# EAGLE board dmgK v36 (EAGLE 9.7.0)
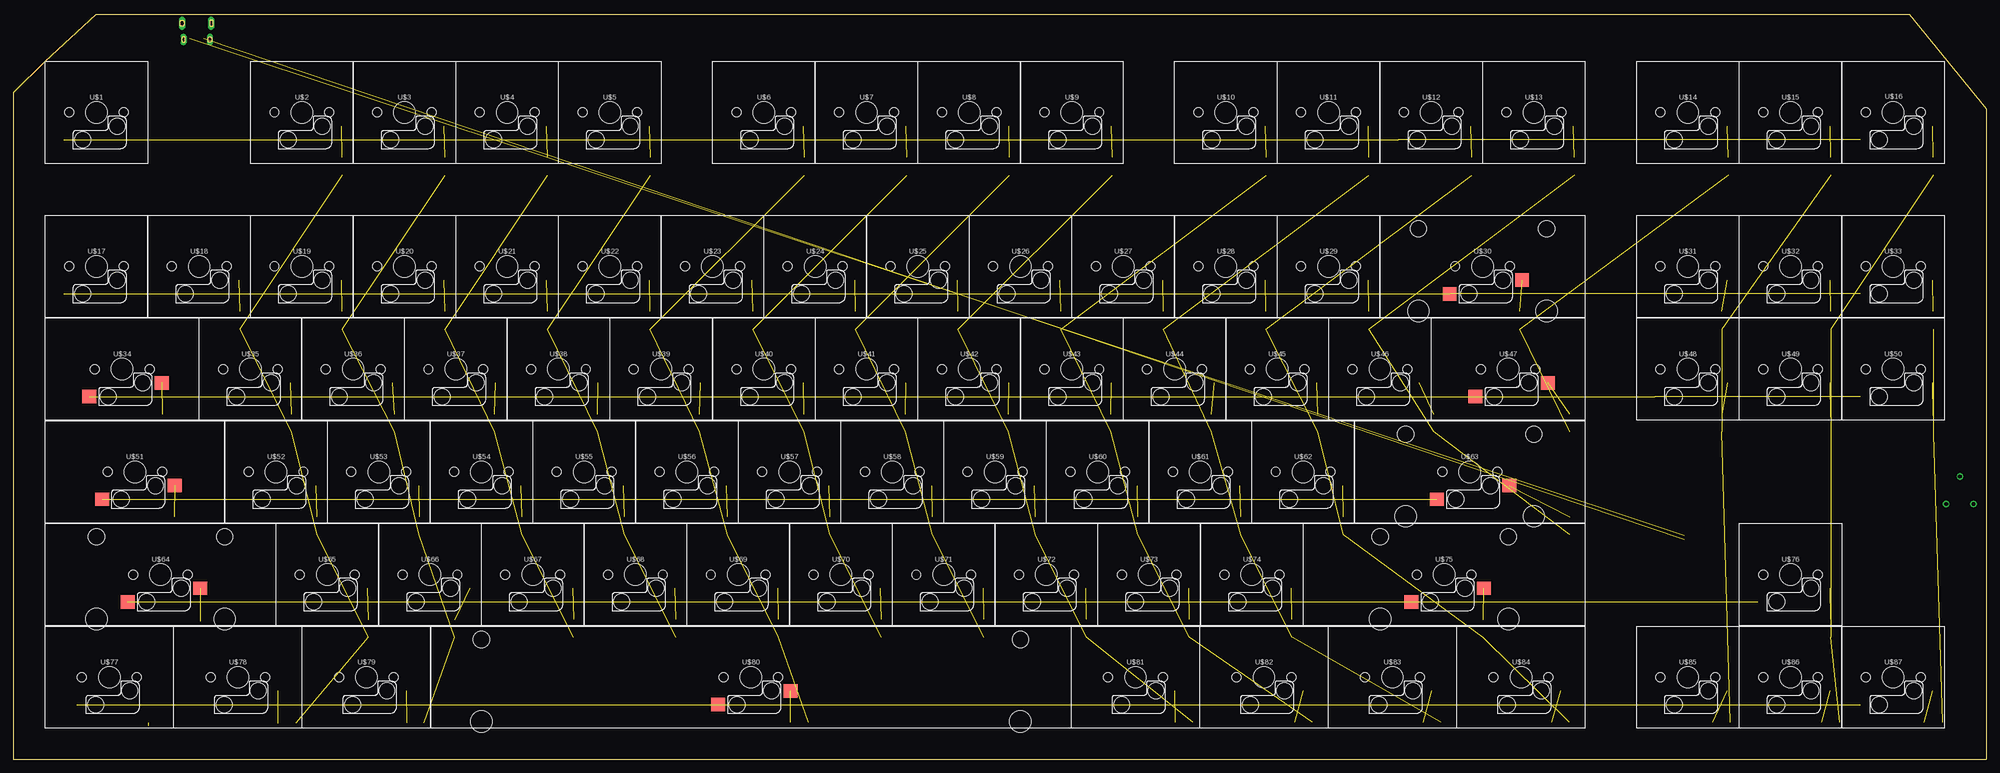
[diagram p0: board, top side]
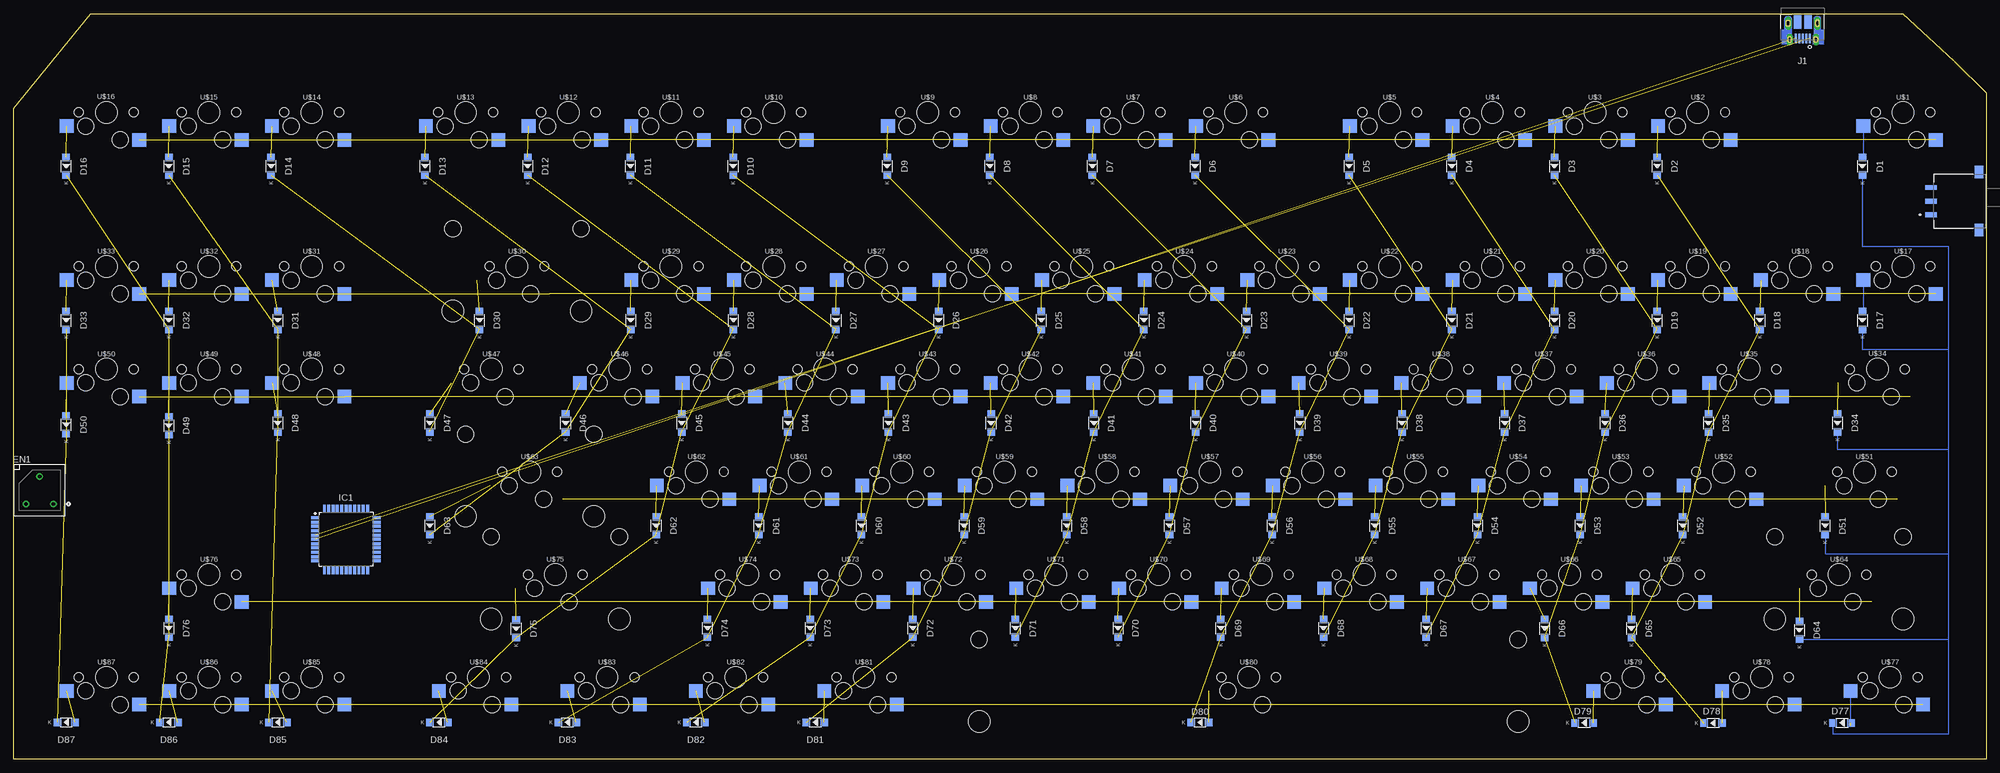
[diagram p1: board, bottom side, seen from below]

Size 366 x 138.22 mm. Coordinates in mm from the lower left corner, seen from the top.
Outline: 15.4,0 351.73,0
Outline: 15.4,0 0,0 0,123.64 5.88,129.53 15.4,138.22 351.73,138.22 366,120.69 366,0 15.4,0
Copper layers (1*16): Top / Bottom
Stack-up Default Layer Stack: Top User Defined 0.035mm / Dielectric-1 User Defined 1.5mm / Bottom User Defined 0.035mm
Design rules "default": minimum track width 6mil, minimum drill 0.35mm, track to track 6mil, track to pad 6mil, pad to pad 6mil, via to via 6mil, smd to smd 6mil, copper to edge 40mil, drill to drill 6mil, minimum pad ring 10mil, minimum via ring 8mil, stop-mask expansion 4mil, vias tented up to drill 0mil, thermal gap 10mil

## Footprints (pad centres in the part's own frame; a part is rotated, then mirrored left to right if it is on the bottom)
SOD-123 = smd 1.397 x 1.397: A -1.651,0; C 1.651,0
3315Y-001-006L = drill 0.71: A 2.54,-2.54; B -2.54,-2.54; C 0,2.54
QFP80P1200X1200X120-44 = smd 1.5 x 0.55: 1 -5.7,4; 2 -5.7,3.2; 3 -5.7,2.4; 4 -5.7,1.6; 5 -5.7,0.8; 6 -5.7,0; 7 -5.7,-0.8; 8 -5.7,-1.6; 9 -5.7,-2.4; 10 -5.7,-3.2; 11 -5.7,-4; 23 5.7,-4; 24 5.7,-3.2; 25 5.7,-2.4; 26 5.7,-1.6; 27 5.7,-0.8; 28 5.7,0; 29 5.7,0.8; 30 5.7,1.6; 31 5.7,2.4; 32 5.7,3.2; 33 5.7,4 | smd 0.55 x 1.5: 12 -4,-5.7; 13 -3.2,-5.7; 14 -2.4,-5.7; 15 -1.6,-5.7; 16 -0.8,-5.7; 17 0,-5.7; 18 0.8,-5.7; 19 1.6,-5.7; 20 2.4,-5.7; 21 3.2,-5.7; 22 4,-5.7; 34 4,5.7; 35 3.2,5.7; 36 2.4,5.7; 37 1.6,5.7; 38 0.8,5.7; 39 0,5.7; 40 -0.8,5.7; 41 -1.6,5.7; 42 -2.4,5.7; 43 -3.2,5.7; 44 -4,5.7
10103594 = smd 0.4 x 1.75: 1 -1.3,2.825; 2 -0.65,2.825; 3 0,2.825; 4 0.65,2.825; 5 1.3,2.825 | smd 1.425 x 2.5: 6 -0.963,-0.25; 7 0.963,-0.25 | drill 0.65 pad 0.73 long: SH1 -2.425,3.03; SH2 2.425,3.03 | drill 0.7 long: SH3 -2.725,0; SH4 2.725,0
ES03MSABE = smd 0.89 x 2.08: 1 2.54,0; 2 0,0; 3 -2.54,0 | smd 2.325 x 1.52: S1 -5.378,8.92; S2 5.378,8.92
MXHSPCB-1U = smd 2.55 x 2.5 bottom: MX1 7.36,-2.54; MX2 -6.09,-5.08 | hole 4: 0,0 | hole 1.7: -5.08,0; 5.08,0 | hole 3: 3.81,-2.54; -2.54,-5.08
MXHSPCB-2U = smd 2.55 x 2.5: MX1 7.36,-2.54; MX2 -6.09,-5.08 | hole 4: 0,0; -11.9,-8.24; 11.9,-8.24 | hole 1.7: -5.08,0; 5.08,0 | hole 3.05: -11.9,7; 11.9,7 | hole 3: 3.81,-2.54; -2.54,-5.08
MXHSPCB-1.5U = smd 2.55 x 2.5: MX1 7.36,-2.54; MX2 -6.09,-5.08 | hole 4: 0,0 | hole 1.7: -5.08,0; 5.08,0 | hole 3: 3.81,-2.54; -2.54,-5.08
MXHSPCB-1.75U = smd 2.55 x 2.5: MX1 7.36,-2.54; MX2 -6.09,-5.08 | hole 4: 0,0 | hole 1.7: -5.08,0; 5.08,0 | hole 3: 3.81,-2.54; -2.54,-5.08
MXHSPCB-2.25U = smd 2.55 x 2.5: MX1 7.36,-2.54; MX2 -6.09,-5.08 | hole 4: 0,0; -11.9,-8.24; 11.9,-8.24 | hole 1.7: -5.08,0; 5.08,0 | hole 3.05: -11.9,7; 11.9,7 | hole 3: 3.81,-2.54; -2.54,-5.08
MXHSPCB-2.75U = smd 2.55 x 2.5: MX1 7.36,-2.54; MX2 -6.09,-5.08 | hole 4: 0,0; -11.9,-8.24; 11.9,-8.24 | hole 1.7: -5.08,0; 5.08,0 | hole 3.05: -11.9,7; 11.9,7 | hole 3: 3.81,-2.54; -2.54,-5.08
MXHSPCB-1.25U = smd 2.55 x 2.5 bottom: MX1 7.36,-2.54; MX2 -6.09,-5.08 | hole 4: 0,0 | hole 1.7: -5.08,0; 5.08,0 | hole 3: 3.81,-2.54; -2.54,-5.08
MXHSPCB-6.25U = smd 2.55 x 2.5: MX1 7.36,-2.54; MX2 -6.09,-5.08 | hole 4: 0,0; -50,-8.24; 50,-8.24 | hole 1.7: -5.08,0; 5.08,0 | hole 3: 3.81,-2.54; -2.54,-5.08 | hole 3.05: -50,7; 50,7

## Placement (x,y rotation side)
D1  DIODE  [SOD-123]  22.93,110 270 bottom
D2  DIODE  [SOD-123]  61.03,110 270 bottom
D3  DIODE  [SOD-123]  80.08,110 270 bottom
D4  DIODE  [SOD-123]  99.13,110 270 bottom
D5  DIODE  [SOD-123]  118.18,110 270 bottom
D6  DIODE  [SOD-123]  146.75,110 270 bottom
D7  DIODE  [SOD-123]  165.8,110 270 bottom
D8  DIODE  [SOD-123]  184.85,110 270 bottom
D9  DIODE  [SOD-123]  203.9,110 270 bottom
D10  DIODE  [SOD-123]  232.48,110 270 bottom
D11  DIODE  [SOD-123]  251.53,110 270 bottom
D12  DIODE  [SOD-123]  270.58,110 270 bottom
D13  DIODE  [SOD-123]  289.63,110 270 bottom
D14  DIODE  [SOD-123]  318.2,110 270 bottom
D15  DIODE  [SOD-123]  337.17,110 270 bottom
D16  DIODE  [SOD-123]  356.22,110 270 bottom
D17  DIODE  [SOD-123]  22.93,81.42 270 bottom
D18  DIODE  [SOD-123]  41.97,81.42 270 bottom
D19  DIODE  [SOD-123]  61.02,81.42 270 bottom
D20  DIODE  [SOD-123]  80.06,81.42 270 bottom
D21  DIODE  [SOD-123]  99.11,81.42 270 bottom
D22  DIODE  [SOD-123]  118.16,81.42 270 bottom
D23  DIODE  [SOD-123]  137.2,81.42 270 bottom
D24  DIODE  [SOD-123]  156.25,81.42 270 bottom
D25  DIODE  [SOD-123]  175.29,81.42 270 bottom
D26  DIODE  [SOD-123]  194.34,81.42 270 bottom
D27  DIODE  [SOD-123]  213.38,81.42 270 bottom
D28  DIODE  [SOD-123]  232.43,81.42 270 bottom
D29  DIODE  [SOD-123]  251.47,81.42 270 bottom
D30  DIODE  [SOD-123]  279.53,81.42 270 bottom
D31  DIODE  [SOD-123]  316.95,81.42 270 bottom
D32  DIODE  [SOD-123]  337.17,81.42 270 bottom
D33  DIODE  [SOD-123]  356.22,81.42 270 bottom
D34  DIODE  [SOD-123]  27.56,62.38 270 bottom
D35  DIODE  [SOD-123]  51.5,62.38 270 bottom
D36  DIODE  [SOD-123]  70.69,62.38 270 bottom
D37  DIODE  [SOD-123]  89.3,62.38 270 bottom
D38  DIODE  [SOD-123]  108.37,62.38 270 bottom
D39  DIODE  [SOD-123]  127.31,62.38 270 bottom
D40  DIODE  [SOD-123]  146.65,62.38 270 bottom
D41  DIODE  [SOD-123]  165.54,62.38 270 bottom
D42  DIODE  [SOD-123]  184.62,62.38 270 bottom
D43  DIODE  [SOD-123]  203.64,62.38 270 bottom
D44  DIODE  [SOD-123]  222.3,62.38 270 bottom
D45  DIODE  [SOD-123]  242,62.38 270 bottom
D46  DIODE  [SOD-123]  263.56,62.38 270 bottom
D47  DIODE  [SOD-123]  288.75,62.38 270 bottom
D48  DIODE  [SOD-123]  316.95,62.38 270 bottom
D49  DIODE  [SOD-123]  337.17,61.89 270 bottom
D50  DIODE  [SOD-123]  356.22,62.06 270 bottom
D51  DIODE  [SOD-123]  29.86,43.33 270 bottom
D52  DIODE  [SOD-123]  56.26,43.33 270 bottom
D53  DIODE  [SOD-123]  75.31,43.33 270 bottom
D54  DIODE  [SOD-123]  94.36,43.33 270 bottom
D55  DIODE  [SOD-123]  113.41,43.33 270 bottom
D56  DIODE  [SOD-123]  132.46,43.33 270 bottom
D57  DIODE  [SOD-123]  151.51,43.33 270 bottom
D58  DIODE  [SOD-123]  170.56,43.33 270 bottom
D59  DIODE  [SOD-123]  189.61,43.33 270 bottom
D60  DIODE  [SOD-123]  208.66,43.33 270 bottom
D61  DIODE  [SOD-123]  227.71,43.33 270 bottom
D62  DIODE  [SOD-123]  246.76,43.33 270 bottom
D63  DIODE  [SOD-123]  288.75,43.33 270 bottom
D64  DIODE  [SOD-123]  34.62,23.93 270 bottom
D65  DIODE  [SOD-123]  65.79,24.28 270 bottom
D66  DIODE  [SOD-123]  81.89,24.28 270 bottom
D67  DIODE  [SOD-123]  103.89,24.31 270 bottom
D68  DIODE  [SOD-123]  122.94,24.31 270 bottom
D69  DIODE  [SOD-123]  141.99,24.31 270 bottom
D70  DIODE  [SOD-123]  161.04,24.31 270 bottom
D71  DIODE  [SOD-123]  180.09,24.31 270 bottom
D72  DIODE  [SOD-123]  199.14,24.31 270 bottom
D73  DIODE  [SOD-123]  218.19,24.31 270 bottom
D74  DIODE  [SOD-123]  237.24,24.31 270 bottom
D75  DIODE  [SOD-123]  272.73,24.23 270 bottom
D76  DIODE  [SOD-123]  337.17,24.31 270 bottom
D77  DIODE  [SOD-123]  26.73,6.76 180 bottom
D78  DIODE  [SOD-123]  50.67,6.73 180 bottom
D79  DIODE  [SOD-123]  74.57,6.78 180 bottom
D80  DIODE  [SOD-123]  145.85,6.84 180 bottom
D81  DIODE  [SOD-123]  217.22,6.86 180 bottom
D82  DIODE  [SOD-123]  239.39,6.86 180 bottom
D83  DIODE  [SOD-123]  263.22,6.86 180 bottom
D84  DIODE  [SOD-123]  287.05,6.86 180 bottom
D85  DIODE  [SOD-123]  316.95,6.86 180 bottom
D86  DIODE  [SOD-123]  337.17,6.86 180 bottom
D87  DIODE  [SOD-123]  356.22,6.86 180 bottom
EN1  3315Y-001-006L  [3315Y-001-006L]  361.14,49.92 0 bottom
IC1  ATMEGA16  [QFP80P1200X1200X120-44]  304.3,40.81 0 bottom
J1  10103594  [10103594]  34.01,136.54 180 bottom
S1  ES03MSABE  [ES03MSABE]  10.22,103.53 270 bottom
U$1  KS-MXHSPCB-1.0U  [MXHSPCB-1U]  15.4,120 0 top
U$2  KS-MXHSPCB-1.0U  [MXHSPCB-1U]  53.5,120 0 top
U$3  KS-MXHSPCB-1.0U  [MXHSPCB-1U]  72.55,120 0 top
U$4  KS-MXHSPCB-1.0U  [MXHSPCB-1U]  91.6,120 0 top
U$5  KS-MXHSPCB-1.0U  [MXHSPCB-1U]  110.65,120 0 top
U$6  KS-MXHSPCB-1.0U  [MXHSPCB-1U]  139.22,120 0 top
U$7  KS-MXHSPCB-1.0U  [MXHSPCB-1U]  158.28,120 0 top
U$8  KS-MXHSPCB-1.0U  [MXHSPCB-1U]  177.33,120 0 top
U$9  KS-MXHSPCB-1.0U  [MXHSPCB-1U]  196.38,120 0 top
U$10  KS-MXHSPCB-1.0U  [MXHSPCB-1U]  224.95,120 0 top
U$11  KS-MXHSPCB-1.0U  [MXHSPCB-1U]  244,120 0 top
U$12  KS-MXHSPCB-1.0U  [MXHSPCB-1U]  263.05,120 0 top
U$13  KS-MXHSPCB-1.0U  [MXHSPCB-1U]  282.1,120 0 top
U$14  KS-MXHSPCB-1.0U  [MXHSPCB-1U]  310.67,120 0 top
U$15  KS-MXHSPCB-1.0U  [MXHSPCB-1U]  329.72,120 0 top
U$16  KS-MXHSPCB-1.0U  [MXHSPCB-1U]  348.77,120 0 top
U$17  KS-MXHSPCB-1.0U  [MXHSPCB-1U]  15.4,91.42 0 top
U$18  KS-MXHSPCB-1.0U  [MXHSPCB-1U]  34.45,91.42 0 top
U$19  KS-MXHSPCB-1.0U  [MXHSPCB-1U]  53.5,91.42 0 top
U$20  KS-MXHSPCB-1.0U  [MXHSPCB-1U]  72.55,91.42 0 top
U$21  KS-MXHSPCB-1.0U  [MXHSPCB-1U]  91.6,91.42 0 top
U$22  KS-MXHSPCB-1.0U  [MXHSPCB-1U]  110.65,91.42 0 top
U$23  KS-MXHSPCB-1.0U  [MXHSPCB-1U]  129.7,91.42 0 top
U$24  KS-MXHSPCB-1.0U  [MXHSPCB-1U]  148.75,91.42 0 top
U$25  KS-MXHSPCB-1.0U  [MXHSPCB-1U]  167.8,91.42 0 top
U$26  KS-MXHSPCB-1.0U  [MXHSPCB-1U]  186.85,91.42 0 top
U$27  KS-MXHSPCB-1.0U  [MXHSPCB-1U]  205.9,91.42 0 top
U$28  KS-MXHSPCB-1.0U  [MXHSPCB-1U]  224.95,91.42 0 top
U$29  KS-MXHSPCB-1.0U  [MXHSPCB-1U]  244,91.42 0 top
U$30  KS-MXHSPCB-2.0U  [MXHSPCB-2U]  272.57,91.42 0 top
U$31  KS-MXHSPCB-1.0U  [MXHSPCB-1U]  310.67,91.42 0 top
U$32  KS-MXHSPCB-1.0U  [MXHSPCB-1U]  329.72,91.42 0 top
U$33  KS-MXHSPCB-1.0U  [MXHSPCB-1U]  348.77,91.42 0 top
U$34  KS-MXHSPCB-1.5U  [MXHSPCB-1.5U]  20.16,72.38 0 top
U$35  KS-MXHSPCB-1.0U  [MXHSPCB-1U]  43.96,72.38 0 top
U$36  KS-MXHSPCB-1.0U  [MXHSPCB-1U]  63.02,72.38 0 top
U$37  KS-MXHSPCB-1.0U  [MXHSPCB-1U]  82.07,72.38 0 top
U$38  KS-MXHSPCB-1.0U  [MXHSPCB-1U]  101.12,72.38 0 top
U$39  KS-MXHSPCB-1.0U  [MXHSPCB-1U]  120.17,72.38 0 top
U$40  KS-MXHSPCB-1.0U  [MXHSPCB-1U]  139.22,72.38 0 top
U$41  KS-MXHSPCB-1.0U  [MXHSPCB-1U]  158.28,72.38 0 top
U$42  KS-MXHSPCB-1.0U  [MXHSPCB-1U]  177.33,72.38 0 top
U$43  KS-MXHSPCB-1.0U  [MXHSPCB-1U]  196.38,72.38 0 top
U$44  KS-MXHSPCB-1.0U  [MXHSPCB-1U]  215.43,72.38 0 top
U$45  KS-MXHSPCB-1.0U  [MXHSPCB-1U]  234.48,72.38 0 top
U$46  KS-MXHSPCB-1.0U  [MXHSPCB-1U]  253.54,72.38 0 top
U$47  KS-MXHSPCB-1.5U  [MXHSPCB-1.5U]  277.34,72.38 0 top
U$48  KS-MXHSPCB-1.0U  [MXHSPCB-1U]  310.67,72.38 0 top
U$49  KS-MXHSPCB-1.0U  [MXHSPCB-1U]  329.72,72.38 0 top
U$50  KS-MXHSPCB-1.0U  [MXHSPCB-1U]  348.77,72.38 0 top
U$51  KS-MXHSPCB-1.75U  [MXHSPCB-1.75U]  22.54,53.33 0 top
U$52  KS-MXHSPCB-1.0U  [MXHSPCB-1U]  48.72,53.33 0 top
U$53  KS-MXHSPCB-1.0U  [MXHSPCB-1U]  67.78,53.33 0 top
U$54  KS-MXHSPCB-1.0U  [MXHSPCB-1U]  86.83,53.33 0 top
U$55  KS-MXHSPCB-1.0U  [MXHSPCB-1U]  105.89,53.33 0 top
U$56  KS-MXHSPCB-1.0U  [MXHSPCB-1U]  124.94,53.33 0 top
U$57  KS-MXHSPCB-1.0U  [MXHSPCB-1U]  144,53.33 0 top
U$58  KS-MXHSPCB-1.0U  [MXHSPCB-1U]  163.06,53.33 0 top
U$59  KS-MXHSPCB-1.0U  [MXHSPCB-1U]  182.11,53.33 0 top
U$60  KS-MXHSPCB-1.0U  [MXHSPCB-1U]  201.17,53.33 0 top
U$61  KS-MXHSPCB-1.0U  [MXHSPCB-1U]  220.23,53.33 0 top
U$62  KS-MXHSPCB-1.0U  [MXHSPCB-1U]  239.28,53.33 0 top
U$63  KS-MXHSPCB-2.25U  [MXHSPCB-2.25U]  270.21,53.33 0 top
U$64  KS-MXHSPCB-2.25U  [MXHSPCB-2.25U]  27.29,34.28 0 top
U$65  KS-MXHSPCB-1.0U  [MXHSPCB-1U]  58.22,34.28 0 top
U$66  KS-MXHSPCB-1.0U  [MXHSPCB-1U]  77.29,34.28 0 top
U$67  KS-MXHSPCB-1.0U  [MXHSPCB-1U]  96.35,34.28 0 top
U$68  KS-MXHSPCB-1.0U  [MXHSPCB-1U]  115.41,34.28 0 top
U$69  KS-MXHSPCB-1.0U  [MXHSPCB-1U]  134.47,34.28 0 top
U$70  KS-MXHSPCB-1.0U  [MXHSPCB-1U]  153.53,34.28 0 top
U$71  KS-MXHSPCB-1.0U  [MXHSPCB-1U]  172.59,34.28 0 top
U$72  KS-MXHSPCB-1.0U  [MXHSPCB-1U]  191.65,34.28 0 top
U$73  KS-MXHSPCB-1.0U  [MXHSPCB-1U]  210.71,34.28 0 top
U$74  KS-MXHSPCB-1.0U  [MXHSPCB-1U]  229.78,34.28 0 top
U$75  KSMXHSPCB-2.75U  [MXHSPCB-2.75U]  265.46,34.28 0 top
U$76  KS-MXHSPCB-1.0U  [MXHSPCB-1U]  329.72,34.28 0 top
U$77  KS-MXHSPCB-1.25U  [MXHSPCB-1.25U]  17.79,15.22 0 top
U$78  KS-MXHSPCB-1.25U  [MXHSPCB-1.25U]  41.63,15.22 0 top
U$79  KS-MXHSPCB-1.25U  [MXHSPCB-1.25U]  65.48,15.22 0 top
U$80  KS-MXHSPCB-6.25U  [MXHSPCB-6.25U]  136.83,15.22 0 top
U$81  KS-MXHSPCB-1.25U  [MXHSPCB-1.25U]  208.17,15.22 0 top
U$82  KS-MXHSPCB-1.25U  [MXHSPCB-1.25U]  232.02,15.22 0 top
U$83  KS-MXHSPCB-1.25U  [MXHSPCB-1.25U]  255.87,15.22 0 top
U$84  KS-MXHSPCB-1.25U  [MXHSPCB-1.25U]  279.71,15.22 0 top
U$85  KS-MXHSPCB-1.0U  [MXHSPCB-1U]  310.67,15.22 0 top
U$86  KS-MXHSPCB-1.0U  [MXHSPCB-1U]  329.72,15.22 0 top
U$87  KS-MXHSPCB-1.0U  [MXHSPCB-1U]  348.77,15.22 0 top

## Library data of the parts
D1-D87 = Controller
EN1 = Encoders; CREATED_BY: PCBLayout.com; DIGIKEY_PARTNO: 3315Y-001-006L-ND; MANUFACTURER: Bourns Inc.; MPN: 3315Y-001-006L
IC1 = TL; CATEGORY: IC_Embedded; DESCRIPTION: IC MCU 8BIT 32KB FLASH 44TQFP; MANUFACTURER: Microchip Technology; MPN: ATMEGA32-16AQR; OPERATING_TEMP: -40°C to 105°C; PART_STATUS: Active; SERIES: AVR® ATmega; SPEED: 16MHz; SUB-CATEGORY: Microcontroller
J1 = Connector_USB; CATEGORY: Connectors; CONTACTS: 5; CURRENT-RATING: 1.8A; DESCRIPTION: CONN RCPT USB2.0 MICRO B SMD R/A; GENDER: Receptacle; MANUFACTURER: Amphenol ICC (FCI); MOUNT_TYPE: R/A; MPN: 10103594-0001LF; OPERATING_TEMPERATURE: -30°C ~ 80°C; PART_STATUS: ACTIVE; ROHS_COMPLIANT: COMPLIANT; SUB_CATEGORY: USB; TYPE: USB-micro B; VOLTAGE-RATING: 100VAC
S1 = Switch; CREATED_BY: PCBLayout.com; DIGIKEY_PARTNO: CKN2086TR-ND; MANUFACTURER: C&K; MPN: ES03MSABE
U$1-U$87 = TL

## Nets
AVCC: IC1.27
GND: IC1.6 J1.5
GND1: IC1.18
GND2: IC1.39
GND3: IC1.28
N$1: D1.A U$1.MX1
N$2: D2.A U$2.MX1
N$3: D3.A U$3.MX1
N$4: D4.A U$4.MX1
N$5: D5.A U$5.MX1
N$6: D6.A U$6.MX1
N$7: D7.A U$7.MX1
N$8: D8.A U$8.MX1
N$9: D9.A U$9.MX1
N$10: D10.A U$10.MX1
N$11: D11.A U$11.MX1
N$12: D12.A U$12.MX1
N$13: D13.A U$13.MX1
N$14: D14.A U$14.MX1
N$15: D15.A U$15.MX1
N$16: D16.A U$16.MX1
N$17: D17.A U$17.MX1
N$18: D18.A U$18.MX1
N$19: D19.A U$19.MX1
N$20: D20.A U$20.MX1
N$21: D21.A U$21.MX1
N$22: D22.A U$22.MX1
N$23: D23.A U$23.MX1
N$24: D24.A U$24.MX1
N$25: D25.A U$25.MX1
N$26: D26.A U$26.MX1
N$27: D27.A U$27.MX1
N$28: D28.A U$28.MX1
N$29: D29.A U$29.MX1
N$30: D30.A U$30.MX1
N$31: D31.A U$31.MX1
N$32: D32.A U$32.MX1
N$33: D33.A U$33.MX1
N$34: D34.A U$34.MX1
N$35: D35.A U$35.MX1
N$36: D36.A U$36.MX1
N$37: D37.A U$37.MX1
N$38: D38.A U$38.MX1
N$39: D39.A U$39.MX1
N$40: D40.A U$40.MX1
N$41: D41.A U$41.MX1
N$42: D42.A U$42.MX1
N$43: D43.A U$43.MX1
N$44: D44.A U$44.MX1
N$45: D45.A U$45.MX1
N$46: D46.A U$46.MX1
N$47: D47.A U$47.MX1
N$48: D48.A U$48.MX1
N$49: D49.A U$49.MX1
N$50: D50.A U$50.MX1
N$51: D51.A U$51.MX1
N$52: D52.A U$52.MX1
N$53: D53.A U$53.MX1
N$54: D54.A U$54.MX1
N$55: D55.A U$55.MX1
N$56: D56.A U$56.MX1
N$57: D57.A U$57.MX1
N$58: D58.A U$58.MX1
N$59: D59.A U$59.MX1
N$60: D60.A U$60.MX1
N$61: D61.A U$61.MX1
N$62: D62.A U$62.MX1
N$63: D63.A U$63.MX1
N$64: D64.A U$64.MX1
N$65: D65.A U$65.MX1
N$66: D66.A U$66.MX1
N$67: D67.A U$67.MX1
N$68: D68.A U$68.MX1
N$69: D69.A U$69.MX1
N$70: D70.A U$70.MX1
N$71: D71.A U$71.MX1
N$72: D72.A U$72.MX1
N$73: D73.A U$73.MX1
N$74: D74.A U$74.MX1
N$75: D75.A U$75.MX1
N$76: D76.A U$76.MX1
N$77: D77.A U$77.MX1
N$78: D78.A U$78.MX1
N$79: D79.A U$79.MX1
N$80: D80.A U$80.MX1
N$81: D81.A U$81.MX1
N$82: D82.A U$82.MX1
N$83: D83.A U$83.MX1
N$84: D84.A U$84.MX1
N$85: D85.A U$85.MX1
N$86: D86.A U$86.MX1
N$87: D87.A U$87.MX1
N$88: U$1.MX2 U$2.MX2 U$3.MX2 U$4.MX2 U$5.MX2 U$6.MX2 U$7.MX2 U$8.MX2 U$9.MX2 U$10.MX2 U$11.MX2 U$12.MX2 U$13.MX2 U$14.MX2 U$15.MX2 U$16.MX2
N$89: U$17.MX2 U$18.MX2 U$19.MX2 U$20.MX2 U$21.MX2 U$22.MX2 U$23.MX2 U$24.MX2 U$25.MX2 U$26.MX2 U$27.MX2 U$28.MX2 U$29.MX2 U$30.MX2 U$31.MX2 U$32.MX2 U$33.MX2
N$90: U$34.MX2 U$35.MX2 U$36.MX2 U$37.MX2 U$38.MX2 U$39.MX2 U$40.MX2 U$41.MX2 U$42.MX2 U$43.MX2 U$44.MX2 U$45.MX2 U$46.MX2 U$47.MX2 U$48.MX2 U$49.MX2 U$50.MX2
N$91: U$51.MX2 U$52.MX2 U$53.MX2 U$54.MX2 U$55.MX2 U$56.MX2 U$57.MX2 U$58.MX2 U$59.MX2 U$60.MX2 U$61.MX2 U$62.MX2 U$63.MX2
N$92: U$64.MX2 U$65.MX2 U$66.MX2 U$67.MX2 U$68.MX2 U$69.MX2 U$70.MX2 U$71.MX2 U$72.MX2 U$73.MX2 U$74.MX2 U$75.MX2 U$76.MX2
N$93: U$77.MX2 U$78.MX2 U$79.MX2 U$80.MX2 U$81.MX2 U$82.MX2 U$83.MX2 U$84.MX2 U$85.MX2 U$86.MX2 U$87.MX2
N$94: D33.C D50.C D87.C
N$95: D16.C D32.C D49.C D76.C D86.C
N$96: D15.C D31.C D48.C D85.C
N$97: D14.C D30.C D47.C
N$98: D13.C D29.C D46.C D63.C
N$99: D12.C D28.C D45.C D62.C D75.C D84.C
N$100: D11.C D27.C D44.C D61.C D74.C D83.C
N$101: D10.C D26.C D43.C D60.C D73.C D82.C
N$102: D9.C D25.C D42.C D59.C D72.C D81.C
N$103: D8.C D24.C D41.C D58.C D71.C
N$104: D7.C D23.C D40.C D57.C D70.C
N$105: D6.C D22.C D39.C D56.C D69.C D80.C
N$106: D5.C D21.C D38.C D55.C D68.C
N$107: D4.C D20.C D37.C D54.C D67.C
N$108: D3.C D19.C D36.C D53.C D66.C D79.C
N$109: D2.C D18.C D35.C D52.C D65.C D78.C
N$110: D1.C D17.C D34.C D51.C D64.C D77.C
VCC: IC1.5 J1.1
VCC1: IC1.17
VCC2: IC1.38

## Tracks (layer width: path | path; a pad name or v marks a point on that pad's centre or on a via)
GND  (1 unrouted)
N$1
  Bottom 0.152: D1.A 22.76,111.82 U$1.MX1
N$2  (1 unrouted)
N$3  (1 unrouted)
N$4  (1 unrouted)
N$5  (1 unrouted)
N$6  (1 unrouted)
N$7  (1 unrouted)
N$8  (1 unrouted)
N$9  (1 unrouted)
N$10  (1 unrouted)
N$11  (1 unrouted)
N$12  (1 unrouted)
N$13  (1 unrouted)
N$14  (1 unrouted)
N$15  (1 unrouted)
N$16  (1 unrouted)
N$17
  Bottom 0.152: U$17.MX1 22.76,83.08 D17.A
N$18  (1 unrouted)
N$19  (1 unrouted)
N$20  (1 unrouted)
N$21  (1 unrouted)
N$22  (1 unrouted)
N$23  (1 unrouted)
N$24  (1 unrouted)
N$25  (1 unrouted)
N$26  (1 unrouted)
N$27  (1 unrouted)
N$28  (1 unrouted)
N$29  (1 unrouted)
N$30  (1 unrouted)
N$31  (1 unrouted)
N$32  (1 unrouted)
N$33  (1 unrouted)
N$34  (1 unrouted)
N$35  (1 unrouted)
N$36  (1 unrouted)
N$37  (1 unrouted)
N$38  (1 unrouted)
N$39  (1 unrouted)
N$40  (1 unrouted)
N$41  (1 unrouted)
N$42  (1 unrouted)
N$43  (1 unrouted)
N$44  (1 unrouted)
N$45  (1 unrouted)
N$46  (1 unrouted)
N$47  (1 unrouted)
N$48  (1 unrouted)
N$49  (1 unrouted)
N$50  (1 unrouted)
N$51  (1 unrouted)
N$52  (1 unrouted)
N$53  (1 unrouted)
N$54  (1 unrouted)
N$55  (1 unrouted)
N$56  (1 unrouted)
N$57  (1 unrouted)
N$58  (1 unrouted)
N$59  (1 unrouted)
N$60  (1 unrouted)
N$61  (1 unrouted)
N$62  (1 unrouted)
N$63  (1 unrouted)
N$64  (1 unrouted)
N$65  (1 unrouted)
N$66  (1 unrouted)
N$67  (1 unrouted)
N$68  (1 unrouted)
N$69  (1 unrouted)
N$70  (1 unrouted)
N$71  (1 unrouted)
N$72  (1 unrouted)
N$73  (1 unrouted)
N$74  (1 unrouted)
N$75  (1 unrouted)
N$76  (1 unrouted)
N$77  (1 unrouted)
  Bottom 0.152: U$77.MX1 25.15,6.2 25.13,6.2
N$78  (1 unrouted)
N$79  (1 unrouted)
N$80  (1 unrouted)
N$81  (1 unrouted)
N$82  (1 unrouted)
N$83  (1 unrouted)
N$84  (1 unrouted)
N$85  (1 unrouted)
N$86  (1 unrouted)
N$87  (1 unrouted)
N$88  (15 unrouted)
N$89  (16 unrouted)
N$90  (16 unrouted)
N$91  (12 unrouted)
N$92  (12 unrouted)
N$93  (10 unrouted)
N$94  (2 unrouted)
N$95  (4 unrouted)
N$96  (3 unrouted)
N$97  (2 unrouted)
N$98  (3 unrouted)
N$99  (5 unrouted)
N$100  (5 unrouted)
N$101  (5 unrouted)
N$102  (5 unrouted)
N$103  (4 unrouted)
N$104  (4 unrouted)
N$105  (5 unrouted)
N$106  (4 unrouted)
N$107  (4 unrouted)
N$108  (5 unrouted)
N$109  (5 unrouted)
N$110
  Bottom 0.152: D1.C 22.93,95.18 6.97,95.18 6.97,76.1 | 6.97,76.1 6.97,57.48 | 6.97,57.48 6.97,38.16 | 6.97,38.16 6.97,22.28 | 6.97,22.28 6.97,4.62 28.38,4.62 D77.C | D64.C 6.97,22.28 | D51.C 29.86,38.16 6.97,38.16 | D34.C 27.56,57.48 6.97,57.48 | D17.C 22.93,76.1 6.97,76.1
VCC  (1 unrouted)